# Altium PCB ClubNIKA.PcbDoc (part 1 of 3)
Units mm, origin at the board's own origin, x right, y up, seen from the top; angles counter-clockwise.
Board outline 246.38 x 165.73 mm, 2 copper layers (Top Layer, Bottom Layer); 346 components, 273 nets, 1174 pads, 422 vias.
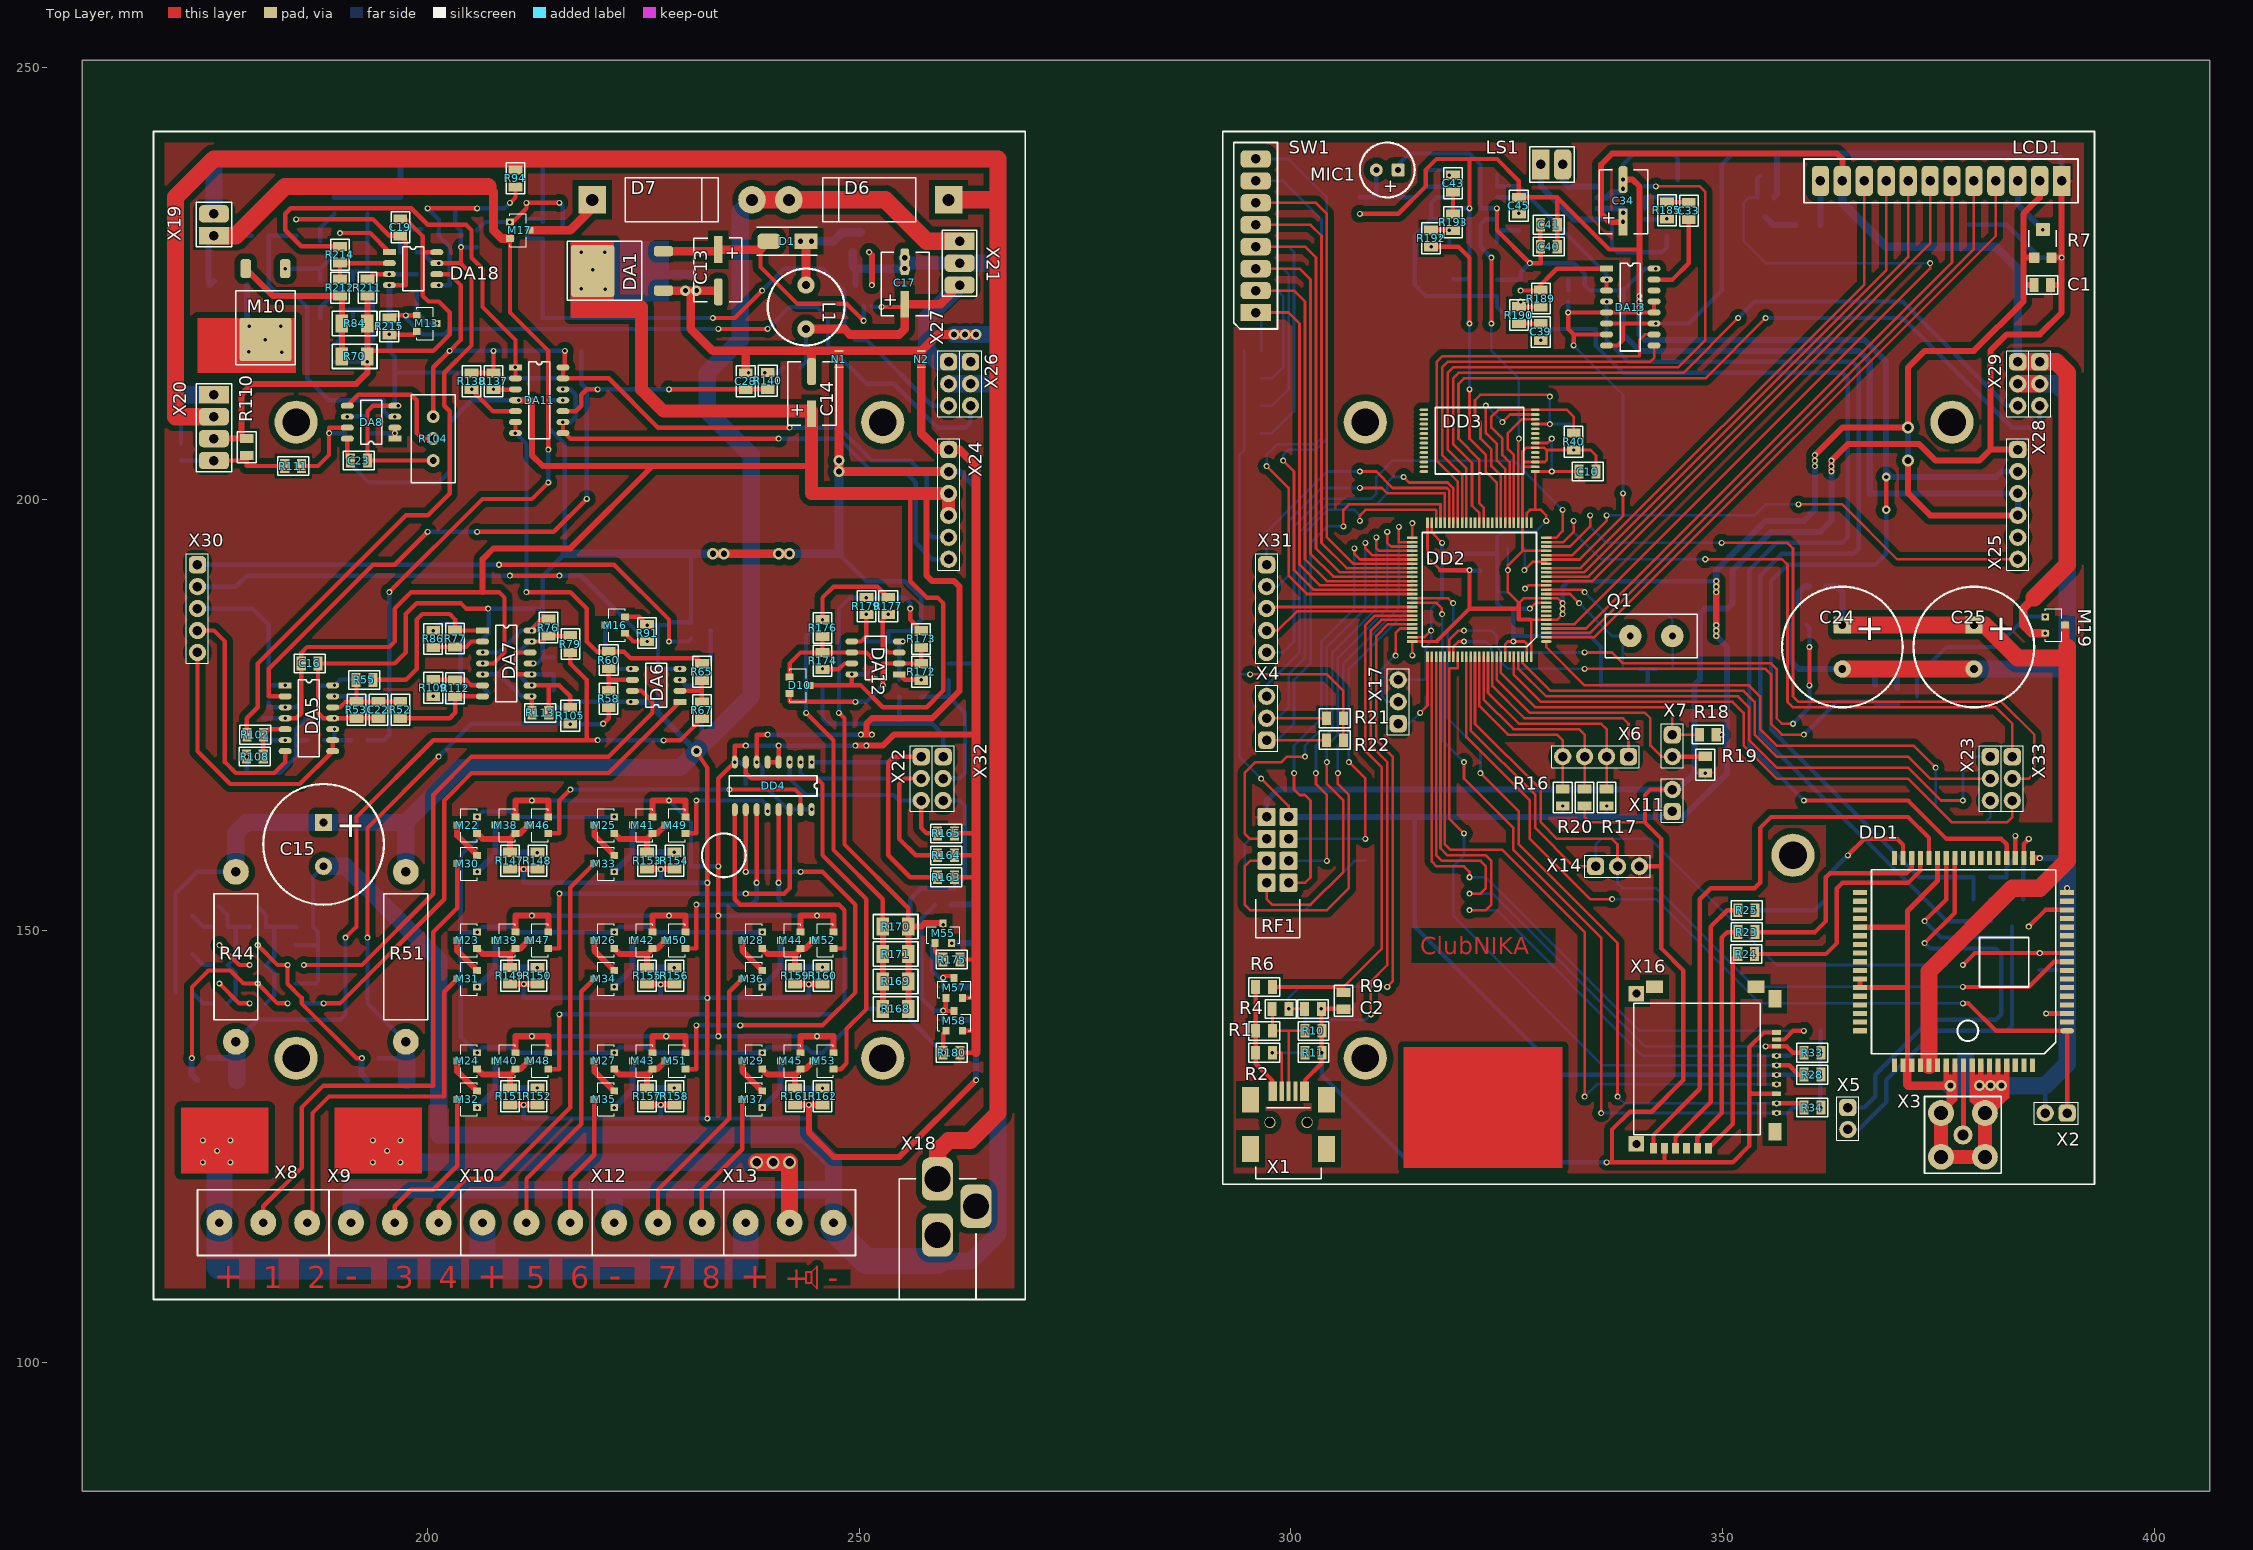
[diagram p0: Top Layer view]
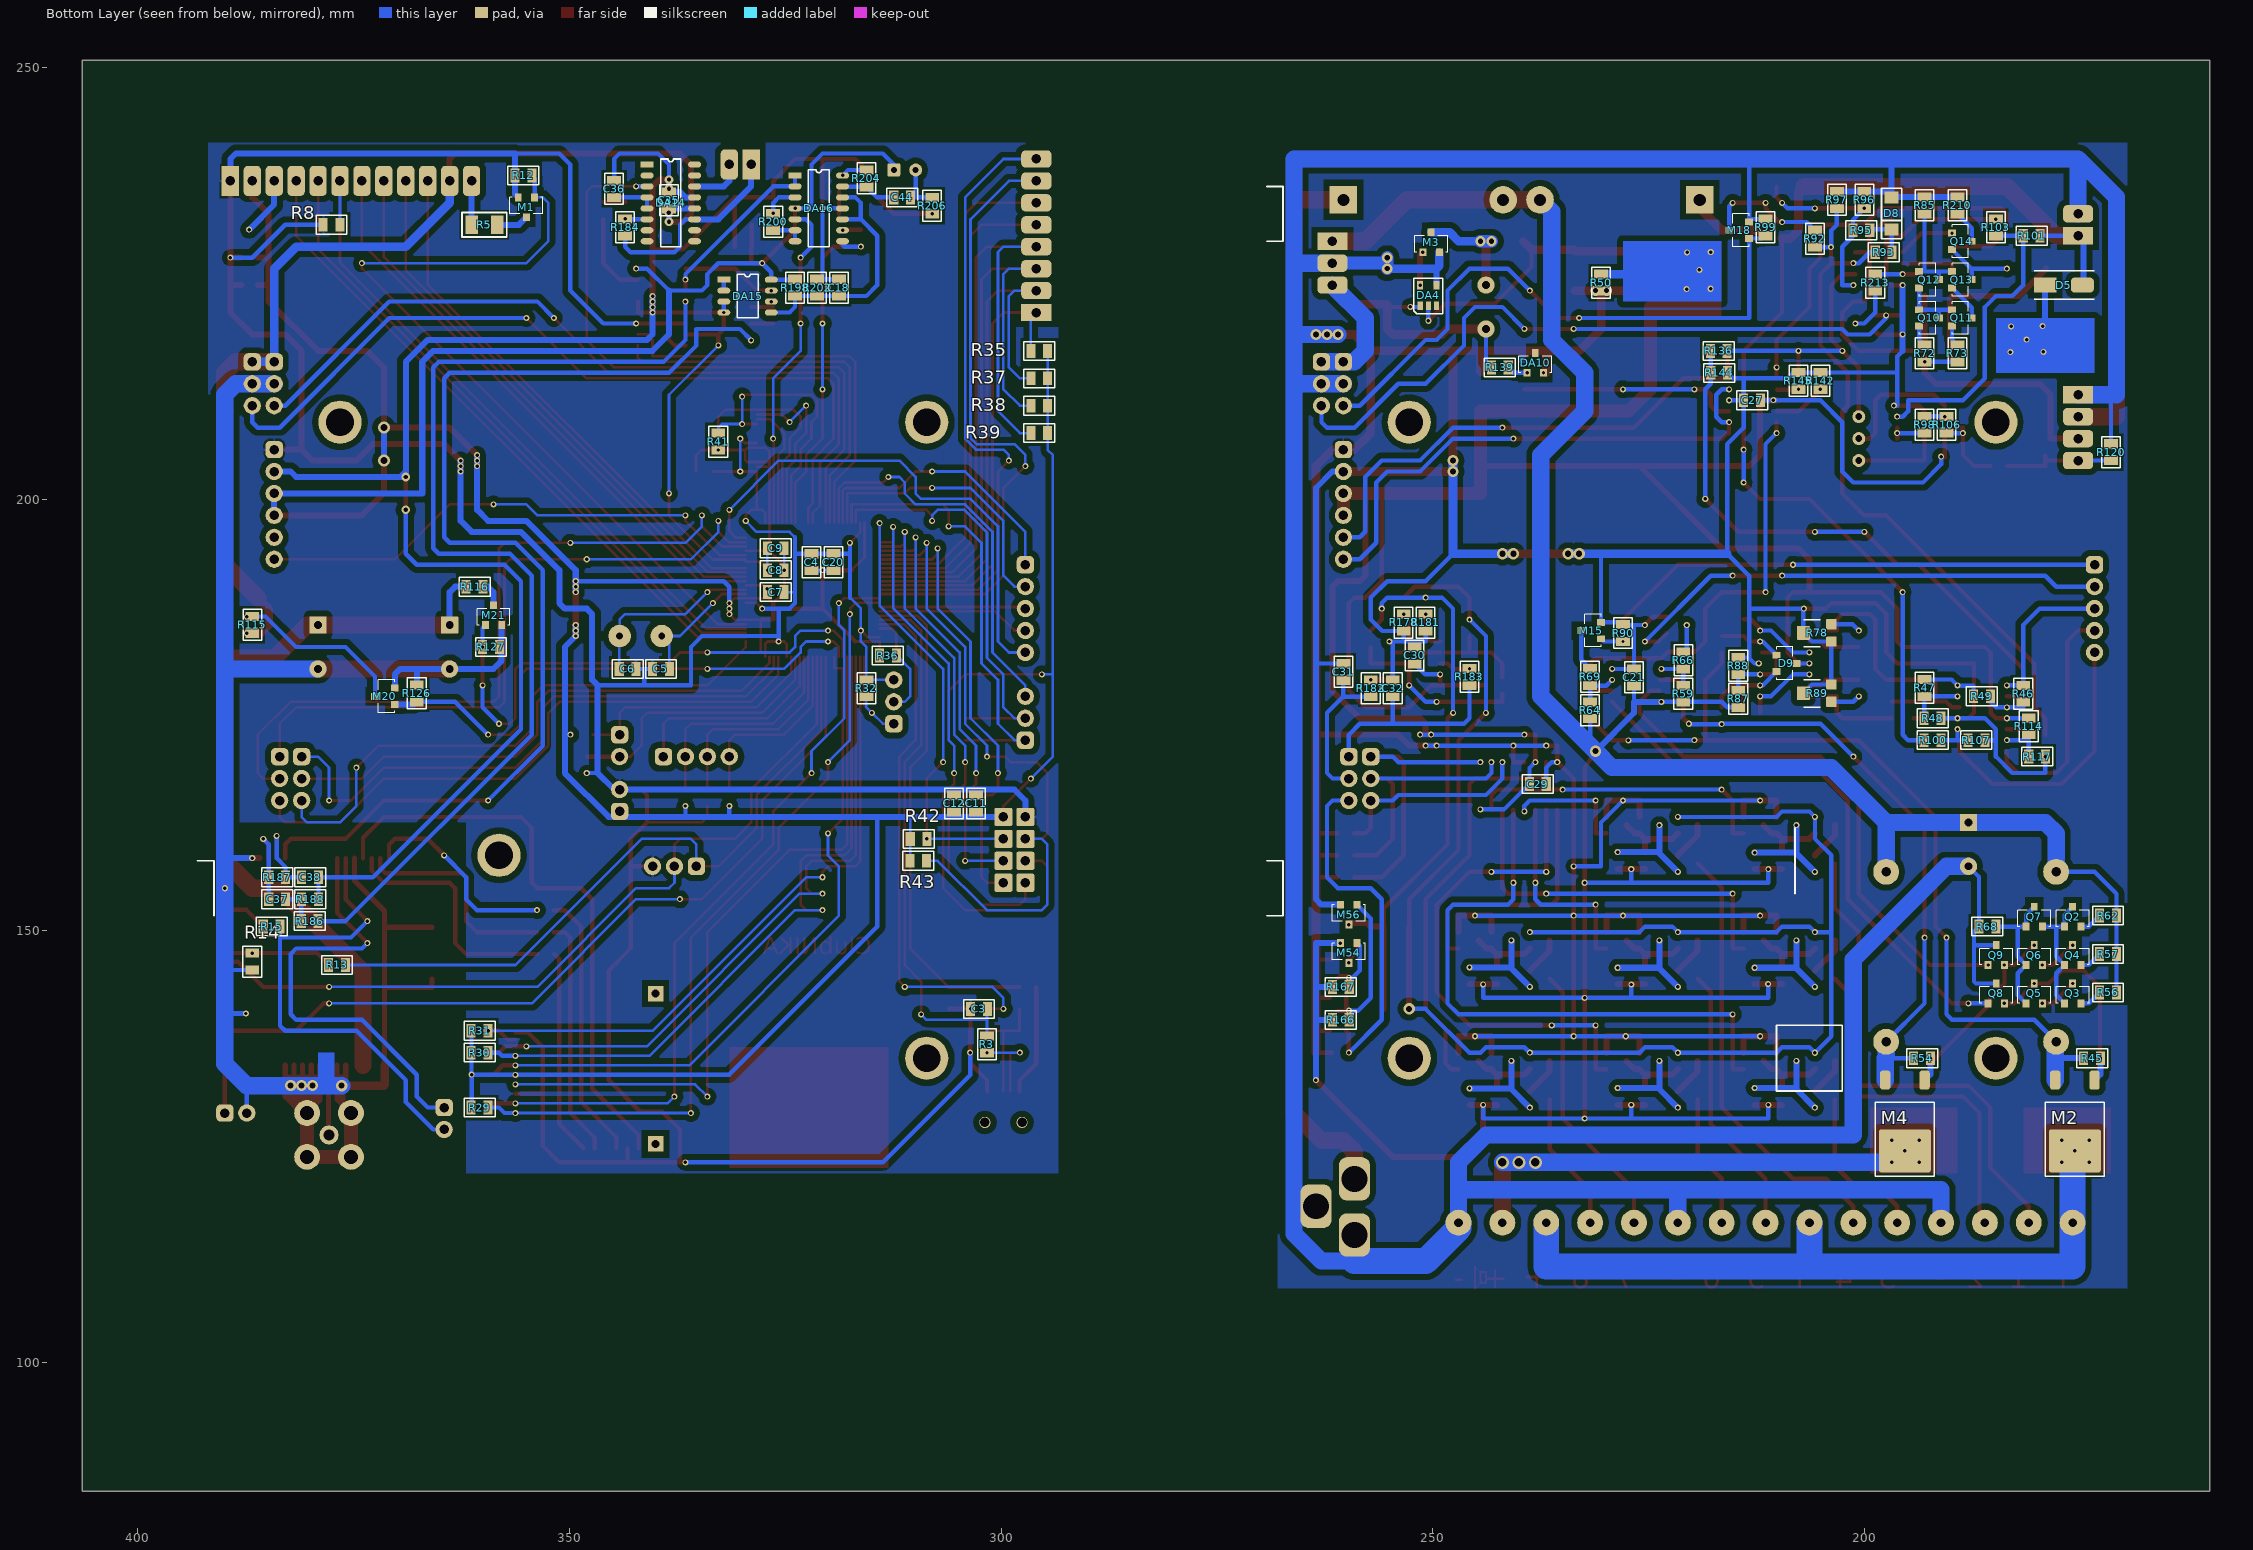
[diagram p1: Bottom Layer view, seen from below]

## Layer stack, top to bottom
Top Layer: signal copper 0.0356
Dielectric: dielectric 0.32, FR-4, Dk 4.8
Bottom Layer: signal copper 0.0356

## Board outline
160.02,250.825 160.02,85.09 406.4,85.09 406.4,250.825

## Design rules (kind name [scope] priority, off if disabled: settings)
Clearance Clearance_2 [All vs IsRegion] p1: gap=0.7
Clearance Clearance_1 [All vs IsVia] p2: gap=0.4
Clearance [All] p3: gap=0.2
ComponentClearance [All] p1: gap=0 collisioncheckmode=3 verticalgap=0 showdistances=FALSE
PlaneConnect [All] p1: planeconnectstyle=Relief reliefexpansion=0.6 reliefentries=4 reliefconductorwidth=0.3 reliefairgap=0.3
PolygonConnect [All] p1: connectstyle=Relief reliefconductorwidth=0.254 reliefentries=4 polygonreliefangle="90 Angle" airgapwidth=0.254
RoutingVias [All] p1: holewidth=0.7 width=1.3 viastyle="Through Hole" minholewidth=0.3 minwidth=0.6 maxholewidth=3 maxwidth=3.5
SilkscreenOverComponentPads [All] p1: minsilkscreentomaskgap=0.254
SolderMaskExpansion [All] p1: expansion=0.2
Width [All] p1: maxlimit=3 minlimit=0.2 preferedwidth=0.7
25 further rules are at their usual default settings.

## Classes and differential pairs
component class ClubNIKA: C1 C2 C3 C4 C5 C6 C7 C8 C9 C10 C11 C12 C20 C24 C25 DD1 DD2 DD3 LCD1 M1 M19 M20 M21 Q1 R1 R2 R3 R4 R5 R6 R7 R8 R9 R10 R11 R12 R13 R14 R15 R16 R17 R18 R19 R20 R21 R22 R23 R24 R25 R28 R29 R30 R31 R32 R33 R34 R35 R36 R37 R38 R39 R40 R41 R42 R43 R115 R116 R126 R127 RF1 SW1 X1 X2 X3 X4 X5 X6 X7 X8 X9 X10 X11 X12 X13 X14 X16 X17 X18 X19 X22 X23 X24 X25 X26 X27 X28 X29 X30 X31 X32 X33
component class Sound: C18 C33 C34 C35 C36 C37 C38 C39 C40 C41 C43 C44 C45 DA13 DA14 DA15 DA16 LS1 MIC1 R184 R185 R186 R187 R188 R189 R190 R192 R193 R198 R200 R202 R204 R206
component class Supply: C13 C14 C15 C16 C17 C19 C21 C22 C23 C27 C28 D1 D5 D6 D7 D8 D9 DA1 DA4 DA5 DA6 DA7 DA8 DA10 DA11 DA18 L1 M2 M3 M4 M10 M13 M15 M16 M17 M18 N1 N2 Q2 Q3 Q4 Q5 Q6 Q7 Q8 Q9 Q10 Q11 Q12 Q13 Q14 R44 R45 R46 R47 R48 R49 R50 R51 R52 R53 R54 R55 R56 R57 R58 R59 R60 R62 R64 R65 R66 R67 R68 R69 R70 R72 R73 R76 R77 R78 R79 R84 R85 R86 R87 R88 R89 R90 R91 R92 R93 R94 R95 R96 R97 R98 R99 R100 R101 R102 R103 R104 R105 R106 R107 R108 R109 R110 R111 R112 R113 R114 R117 R120 R136 R137 R138 R139 R140 R142 R144 R145 R210 R211 R212 R213 R214 R215 X20 X21
component class Zones: C29 C30 C31 C32 D10 DA12 DD4 M22 M23 M24 M25 M26 M27 M28 M29 M30 M31 M32 M33 M34 M35 M36 M37 M38 M39 M40 M41 M42 M43 M44 M45 M46 M47 M48 M49 M50 M51 M52 M53 M54 M55 M56 M57 M58 R147 R148 R149 R150 R151 R152 R153 R154 R155 R156 R157 R158 R159 R160 R161 R162 R163 R164 R165 R166 R167 R168 R169 R170 R171 R172 R173 R174 R175 R176 R177 R178 R179 R180 R181 R182 R183

## Components (designator, comment, footprint, x,y, rotation, side; value= is the part's Value field where it differs from the comment)
C1 "100n" 0805 387.985,224.79 r180 top
C2 "47p" 0805 303.53,140.97 r180 top
C3 "47p" 0805 303.53,140.97 r180 bottom
C4 "100n" 0805 321.945,193.675 r270 bottom
C5 "10pF" 0805 340.36,180.34 r180 bottom
C6 "10pF" 0805 342.265,180.34 r0 bottom
C7 "10n" 0805 325.12,189.23 r0 bottom
C8 "100n" 0805 325.12,191.77 r0 bottom
C9 "10n" 0805 325.12,194.31 r0 bottom
C10 "100n" 0805 333.375,203.2 r0 top
C11 "10n" 0805 302.895,165.735 r270 bottom
C12 "100n" 0805 305.435,165.735 r270 bottom
C13 "220u 6.3V" CALUM_SMD_C 233.68,228.6 r270 top
C14 "47u 6.3V" CALUM_SMD_C 244.475,210.185 r90 top
C15 "10uF 16V" CALUM_THT_E5D13 187.96,160.02 r270 top
C16 "100n" 0805 187.325,180.975 r180 top
C17 "10u 6.3V" CALUM_SMD_C 255.27,222.885 r90 top
C18 "100n" 0805 318.77,225.47 r270 bottom
C19 "100n" 0805 196.85,230.505 r90 top
C20 "1n" 0805 319.405,193.675 r270 bottom
C21 "100n" 0805 226.695,180.34 r270 bottom
C22 "1n" 0805 194.31,174.625 r90 top
C23 "100n" 0805 193.04,204.47 r180 top
C24 "220uF 6.3V" CALUM_THT_E5D13 363.855,182.88 r270 top
C25 "220uF 6.3V" CALUM_THT_E5D13 379.095,182.88 r270 top
C27 "100n" 0805 213.995,211.455 r180 bottom
C28 "2.2u" 0805 236.855,214.63 r270 top
C29 "100n" 0805 236.855,167.005 r0 bottom
C30 "100n" 0805 252.095,182.88 r270 bottom
C31 "10n" 0805 260.35,180.975 r270 bottom
C32 "10n" 0805 254.635,179.07 r270 bottom
C33 "100n" 0805 346.075,232.41 r90 top
C34 "100u 6.3V" CALUM_SMD_C 338.455,232.41 r90 top
C35 "100n" 0805 338.455,235.585 r270 bottom
C36 "2.2u" 0805 344.805,234.95 r90 bottom
C37 "2.2u" 0805 384.81,153.67 r180 bottom
C38 "2.2u" 0805 381,156.21 r180 bottom
C39 "100n" 0805 328.93,220.345 r270 top
C40 "100n" 0805 330.835,229.235 r180 top
C41 "10n" 0805 330.835,231.775 r180 top
C43 "220n" 0805 318.77,235.585 r90 top
C44 "220n" 0805 312.42,234.95 r180 bottom
C45 "10n" 0805 326.39,234.95 r270 top
D1 "S1M" DO-214AC 243.836,229.87 r180 top
D5 "S1M" DO-214AC 179.07,224.79 r180 bottom
D6 "1N5821" DO-201AD 260.35,234.664 r180 top
D7 "1N5821" DO-201AD 219.075,234.664 r0 top
D8 "BZV55C3V0" SOD80 196.85,234.95 r270 bottom
D9 "BAT54C" SOT-23 210.185,180.975 r270 bottom
D10 "BAT54C" SOT-23 241.935,178.435 r270 top
DA1 "MC33269DTRK-3.3" LINREG_DPAK 227.33,224.155 r90 top
DA4 "NCP1450-5V" TSSOP5 249.555,224.79 r0 bottom
DA5 "MCP604" SOP14 183.515,178.435 r0 top
DA6 "LM358" SOP8 229.235,176.53 r180 top
DA7 "MCP604" SOP14 206.375,184.785 r0 top
DA8 "MCP602" SOP8 196.215,207.01 r180 top
DA10 "LM4040C30" SOT-23 238.125,214.63 r180 bottom
DA11 "MCP604" SOP14 210.185,215.265 r0 top
DA12 "MCP602" SOP8 254.635,179.705 r180 top
DA13 "74HC4053" SOP16 336.55,226.695 r0 top
DA14 "TDA8543" SOP16 340.995,238.76 r180 bottom
DA15 "MCP602" SOP8 332.105,225.425 r180 bottom
DA16 "MCP604" SOP14 323.85,237.49 r180 bottom
DA18 "LM358" SOP8 195.58,228.6 r0 top
DD1 "SIM900R" SIM900_R 389.89,138.43 r180 top
DD2 "STM32F103VET6" QFP100 329.565,183.515 r180 top
DD3 "AT45DB161" TSOP28 328.295,203.2 r180 top
DD4 "74HC138" SOP16 244.475,169.545 r270 top
L1 "10uH 1A" INDUCTOR_5mm 243.84,222.25 r270 top
LCD1 "HD44780" LCD_HD44780_5 389.255,236.855 r180 top
LS1 "8 Ohm" PLS_2#1 331.47,238.76 r0 top
M1 "2N7002" SOT-23 354.965,234.95 r0 bottom
M2 "IRFR5505" TO-252(DPAK) 173.355,132.715 r0 bottom
M3 "PMV40UN" SOT-23 250.19,228.6 r180 bottom
M4 "IRFR5505" TO-252(DPAK) 193.04,132.715 r0 bottom
M10 "IRFR9024" TO-252(DPAK) 183.515,226.695 r180 top
M13 "2N7002" SOT-23 198.755,220.345 r270 top
M15 "2N7002" SOT-23 230.505,184.785 r90 bottom
M16 "2N7002" SOT-23 222.885,185.42 r90 top
M17 "IRLML5203" SOT-23 209.55,231.14 r270 top
M18 "2N7002" SOT-23 213.36,231.14 r90 bottom
M19 "IRLML2244" SOT-23 387.35,185.42 r270 top
M20 "2N7002" SOT-23 370.205,177.165 r90 bottom
M21 "2N7002" SOT-23 358.775,185.42 r180 bottom
M22 "2N7002" SOT-23 205.74,162.24 r90 top
M23 "2N7002" SOT-23 205.74,148.905 r90 top
M24 "2N7002" SOT-23 205.74,134.935 r90 top
M25 "2N7002" SOT-23 221.615,162.24 r90 top
M26 "2N7002" SOT-23 221.615,148.905 r90 top
M27 "2N7002" SOT-23 221.615,134.935 r90 top
M28 "2N7002" SOT-23 238.76,148.905 r90 top
M29 "2N7002" SOT-23 238.76,134.935 r90 top
M30 "BSS84" SOT-23 205.74,157.795 r90 top
M31 "BSS84" SOT-23 205.74,144.46 r90 top
M32 "BSS84" SOT-23 205.74,130.49 r90 top
M33 "BSS84" SOT-23 221.615,157.795 r90 top
M34 "BSS84" SOT-23 221.615,144.46 r90 top
M35 "BSS84" SOT-23 221.615,130.49 r90 top
M36 "BSS84" SOT-23 238.76,144.46 r90 top
M37 "BSS84" SOT-23 238.76,130.49 r90 top
M38 "2N7002" SOT-23 210.185,162.24 r90 top
M39 "2N7002" SOT-23 210.185,148.905 r90 top
M40 "2N7002" SOT-23 210.185,134.935 r90 top
M41 "2N7002" SOT-23 226.06,162.24 r90 top
M42 "2N7002" SOT-23 226.06,148.905 r90 top
M43 "2N7002" SOT-23 226.06,134.935 r90 top
M44 "2N7002" SOT-23 243.205,148.905 r90 top
M45 "2N7002" SOT-23 243.205,134.935 r90 top
M46 "2N7002" SOT-23 213.995,162.24 r90 top
M47 "2N7002" SOT-23 213.995,148.905 r90 top
M48 "2N7002" SOT-23 213.995,134.935 r90 top
M49 "2N7002" SOT-23 229.87,162.24 r90 top
M50 "2N7002" SOT-23 229.87,148.905 r90 top
M51 "2N7002" SOT-23 229.87,134.935 r90 top
M52 "2N7002" SOT-23 247.015,148.905 r90 top
M53 "2N7002" SOT-23 247.015,134.935 r90 top
M54 "BSS84" SOT-23 259.715,148.59 r0 bottom
M55 "BSS84" SOT-23 259.715,148.59 r0 top
M56 "2N7002" SOT-23 259.715,153.035 r0 bottom
M57 "2N7002" SOT-23 260.985,142.24 r0 top
M58 "2N7002" SOT-23 260.985,138.43 r0 top
MIC1 "MIC" MIC_6.0x5.2 311.15,238.125 r180 top
N1 "NetTie" NET_TIE_1mm 247.65,215.9 r270 top net-tie
N2 "NetTie" NET_TIE_1mm 257.175,215.9 r270 top net-tie
Q1 "KX-K 8.0 MHz" OSC1_THT_10,8x4,5 344.17,184.15 r180 top
Q2 "BC857C" SOT-23 175.895,150.495 r180 bottom
Q3 "BC857C" SOT-23 175.895,141.605 r180 bottom
Q4 "BC857C" SOT-23 175.895,146.05 r180 bottom
Q5 "BC857C" SOT-23 180.34,141.605 r180 bottom
Q6 "BC857C" SOT-23 180.34,146.05 r180 bottom
Q7 "BC857C" SOT-23 180.34,150.495 r180 bottom
Q8 "BC857C" SOT-23 184.74,141.605 r180 bottom
Q9 "BC857C" SOT-23 184.74,146.05 r180 bottom
Q10 "BC857C" SOT-23 193.675,220.98 r270 bottom
Q11 "BC857C" SOT-23 189.865,220.98 r270 bottom
Q12 "BC857C" SOT-23 193.675,225.425 r270 bottom
Q13 "BC857C" SOT-23 189.865,225.425 r270 bottom
Q14 "BC857C" SOT-23 189.865,229.87 r270 bottom
R1 "1.5K" 0805 295.91,138.43 r0 top
R2 "1.5K" 0805 295.91,135.89 r0 top
R3 "22" 0805 301.625,135.89 r90 bottom
R4 "22" 0805 297.815,140.97 r0 top
R5 "R" 1206 361.315,231.775 r180 bottom
R6 "12K" 0805 295.91,143.51 r0 top
R7 "24K" "3305SMD(adj res)" 386.08,227.965 r0 top
R8 "51K" 0805 376.555,231.775 r0 bottom
R9 "20K" 0805 306.07,142.875 r270 top
R10 "100K" 0805 301.625,138.43 r0 top
R11 "100K" 0805 301.625,135.89 r0 top
R12 "51K" 0805 354.33,237.49 r0 bottom
R13 "270" 0805 375.92,146.05 r0 bottom
R14 "1.2K" 0805 386.715,147.43 r270 bottom
R15 "51K" 0805 385.445,150.495 r180 bottom
R16 "51K" 0805 331.47,164.465 r90 top
R17 "51K" 0805 336.55,164.465 r90 top
R18 "20K" 0805 349.25,172.72 r180 top
R19 "20K" 0805 347.98,168.275 r90 top
R20 "51K" 0805 334.01,164.465 r90 top
R21 "51K" 0805 306.07,174.625 r180 top
R22 "51K" 0805 306.07,172.085 r180 top
R23 "22" 0805 351.79,149.86 r0 top
R24 "22" 0805 353.695,147.32 r180 top
R25 "22" 0805 351.79,152.4 r0 top
R28 "51K" 0805 359.41,133.35 r0 top
R29 "51K" 0805 359.41,129.54 r0 bottom
R30 "51K" 0805 359.41,135.89 r0 bottom
R31 "51K" 0805 359.41,138.43 r0 bottom
R32 "100K" 0805 315.595,179.07 r270 bottom
R33 "51K" 0805 359.41,135.89 r0 top
R34 "51K" 0805 359.41,129.54 r0 top
R35 "51K" 0805 296.545,217.17 r180 bottom
R36 "51K" 0805 312.129,181.885 r0 bottom
R37 "51K" 0805 296.545,213.995 r180 bottom
R38 "51K" 0805 296.545,210.82 r180 bottom
R39 "51K" 0805 296.545,207.645 r180 bottom
R40 "51K" 0805 332.74,207.645 r270 top
R41 "51K" 0805 332.74,207.645 r270 bottom
R42 "51K" 0805 310.515,160.655 r180 bottom
R43 "51K" 0805 308.61,158.115 r0 bottom
R44 "0.51 Ohm 2W" RES_2W 177.8,137.16 r90 top
R45 "51K" 0805 174.625,135.255 r180 bottom
R46 "100K" 0805 181.61,178.435 r270 bottom
R47 "20K" 0805 193.04,177.165 r90 bottom
R48 "10K" 0805 191.135,174.625 r0 bottom
R49 "390" 0805 185.42,177.165 r0 bottom
R50 "1K" 0805 230.505,226.06 r270 bottom
R51 "0.51 Ohm 2W" RES_2W 197.485,137.16 r90 top
R52 "51K" 0805 196.85,174.625 r90 top
R53 "51K" 0805 191.77,174.625 r90 top
R54 "51K" 0805 194.31,135.255 r180 bottom
R55 "51K" 0805 193.675,179.07 r180 top
R56 "100" 0805 170.815,142.875 r0 bottom
R57 "100" 0805 170.815,147.32 r0 bottom
R58 "20K" 0805 220.98,177.845 r270 top
R59 "20K" 0805 220.98,178.435 r270 bottom
R60 "20K" 0805 220.98,180.385 r90 top
R62 "100" 0805 170.815,151.765 r0 bottom
R64 "20K" 0805 231.775,176.53 r270 bottom
R65 "20K" 0805 231.775,180.975 r270 top
R66 "20K" 0805 220.98,180.34 r90 bottom
R67 "20K" 0805 231.775,176.53 r270 top
R68 "5.1K" 0805 184.785,150.495 r0 bottom
R69 "20K" 0805 231.775,178.435 r90 bottom
R70 "2" 1206 193.04,216.535 r180 top
R72 "100" 0805 193.04,215.9 r90 bottom
R73 "100" 0805 189.23,215.9 r90 bottom
R76 "10K" 0805 213.995,184.15 r90 top
R77 "39K" 0805 203.2,182.88 r90 top
R78 "5.1K" "3305SMD(adj res)" 203.835,183.515 r90 bottom
R79 "39K" 0805 216.535,182.245 r90 top
R84 "2" 1206 193.04,220.345 r180 top
R85 "3.6K" 0805 193.04,233.045 r90 bottom
R86 "8.2K" 0805 200.66,184.785 r270 top
R87 "39K" 0805 214.63,175.895 r90 bottom
R88 "10K" 0805 214.63,179.705 r90 bottom
R89 "5.1K" "3305SMD(adj res)" 203.835,176.53 r90 bottom
R90 "51K" 0805 227.965,183.515 r90 bottom
R91 "51K" 0805 225.425,183.515 r90 top
R92 "20K" 0805 205.74,231.14 r270 bottom
R93 "3K" 0805 198.755,228.6 r180 bottom
R94 "39K" 0805 210.185,238.125 r270 top
R95 "100K" 0805 199.39,231.14 r0 bottom
R96 "20K" 0805 200.025,233.68 r90 bottom
R97 "20K" 0805 203.2,233.68 r90 bottom
R98 "20K" 0805 193.04,207.645 r90 bottom
R99 "51K" 0805 211.455,230.505 r90 bottom
R100 "51K" 0805 191.135,172.085 r0 bottom
R101 "56K" 0805 181.61,230.505 r180 bottom
R102 "51K" 0805 179.07,172.72 r0 top
R103 "4.7K" 0805 184.785,230.505 r90 bottom
R104 "10K" "3296 X W(ADJ RES)" 200.66,209.55 r270 top
R105 "39K" 0805 216.535,175.895 r270 top
R106 "20K" 0805 190.5,207.645 r90 bottom
R107 "10K" 0805 186.055,172.085 r0 bottom
R108 "10K" 0805 180.975,170.18 r180 top
R109 "8.2K" 0805 200.66,177.165 r90 top
R110 "62K" 0805 179.07,207.01 r270 top
R111 "4.7K" 0805 185.42,203.835 r180 top
R112 "39K" 0805 203.2,179.07 r270 top
R113 "10K" 0805 212.09,175.26 r0 top
R114 "120K" 0805 180.975,172.72 r90 bottom
R115 "20K" 0805 386.715,184.47 r90 bottom
R116 "51" 0805 361.95,189.865 r180 bottom
R117 "10K" 0805 180.975,170.18 r180 bottom
R120 "51K" 0805 171.45,204.47 r90 bottom
R126 "51K" 0805 367.665,176.53 r90 bottom
R127 "51K" 0805 360.045,182.88 r180 bottom
R136 "100K" 0805 215.9,217.17 r0 bottom
R137 "100K" 0805 207.645,214.63 r270 top
R138 "51K" 0805 205.105,214.63 r270 top
R139 "510" 0805 243.205,215.265 r180 bottom
R140 "1K" 0805 239.395,212.725 r90 top
R142 "51K" 0805 205.105,212.725 r90 bottom
R144 "20K" 0805 217.805,214.63 r180 bottom
R145 "11K" 0805 207.645,212.725 r90 bottom
R147 "100K" 0805 209.55,157.16 r90 top
R148 "100K" 0805 212.725,157.16 r90 top
R149 "100K" 0805 209.55,143.825 r90 top
R150 "100K" 0805 212.725,143.825 r90 top
R151 "100K" 0805 209.55,129.855 r90 top
R152 "100K" 0805 212.725,129.855 r90 top
R153 "100K" 0805 225.425,157.16 r90 top
R154 "100K" 0805 228.6,157.16 r90 top
R155 "100K" 0805 225.425,143.825 r90 top
R156 "100K" 0805 228.6,143.825 r90 top
R157 "100K" 0805 225.425,129.855 r90 top
R158 "100K" 0805 228.6,129.855 r90 top
R159 "100K" 0805 242.57,143.825 r90 top
R160 "100K" 0805 245.745,143.825 r90 top
R161 "100K" 0805 242.57,129.855 r90 top
R162 "100K" 0805 245.745,129.855 r90 top
R163 "51K" 0805 259.08,156.21 r0 top
R164 "51K" 0805 259.08,158.75 r0 top
R165 "51K" 0805 259.08,161.29 r0 top
R166 "51K" 0805 261.62,139.7 r180 bottom
R167 "51K" 0805 261.62,143.51 r180 bottom
R168 "1.6K" 1206 252.73,140.97 r0 top
R169 "1.6K" 1206 252.73,144.145 r0 top
R170 "1.6K" 1206 252.73,150.495 r0 top
R171 "1.6K" 1206 252.73,147.32 r0 top
R172 "20K" 0805 257.175,180.975 r270 top
R173 "82K" 0805 257.175,184.785 r270 top
R174 "20K" 0805 245.745,182.245 r270 top
R175 "51K" 0805 259.715,146.685 r0 top
R176 "82K" 0805 245.745,186.055 r270 top
R177 "82K" 0805 253.365,188.595 r270 top
R178 "20K" 0805 253.365,186.69 r270 bottom
R179 "82K" 0805 250.825,188.595 r270 top
R180 "51K" 0805 259.715,135.89 r0 top
R181 "20K" 0805 250.825,186.69 r270 bottom
R182 "1K" 0805 257.175,179.07 r270 bottom
R183 "1K" 0805 245.745,178.435 r90 bottom
R184 "3.3k" 0805 343.535,230.505 r90 bottom
R185 "10k" 0805 343.535,232.455 r90 top
R186 "100K" 0805 379.095,151.13 r0 bottom
R187 "7.5K" 0805 384.81,156.21 r180 bottom
R188 "100" 0805 381,153.67 r180 bottom
R189 "62K" 0805 328.93,222.25 r90 top
R190 "10K" 0805 326.39,220.345 r90 top
R192 "51K" 0805 316.23,229.235 r90 top
R193 "4.7K" 0805 318.77,233.045 r270 top
R198 "20K" 0805 323.85,225.47 r270 bottom
R200 "2K" 0805 326.39,231.14 r90 bottom
R202 "20K" 0805 321.31,223.52 r90 bottom
R204 "51K" 0805 315.595,238.125 r270 bottom
R206 "4.7K" 0805 307.975,234.95 r270 bottom
R210 "1K" 0805 189.23,233.045 r90 bottom
R211 "20K" 0805 193.04,223.52 r90 top
R212 "20K" 0805 189.865,223.52 r90 top
R213 "20K" 0805 198.755,226.06 r270 bottom
R214 "20K" 0805 189.865,227.33 r90 top
R215 "51K" 0805 195.58,220.98 r270 top
RF1 "NRF24L01" NRF24L01_MOD_ANGLE 297.18,163.195 r270 top
SW1 "KEYBOARD4x4" KEYBOURD_4x4_1 295.91,239.395 r270 top
X1 "mini-USBB" MINI_USBA_FEMALE 299.72,131.445 r0 top
X2 "PLS" PLS_2#2 389.89,128.905 r180 top
X3 "SMA_FEMALE" SMA_FEMALE 375.285,128.905 r0 top
X4 "PLS3" PLS_3 297.18,172.085 r90 top
X5 "PLS" PLS_2#2 364.49,129.54 r270 top
X6 "PLS4" PLS_4 339.09,170.18 r180 top
X7 "PLS" PLS_2#2 344.17,172.72 r270 top
X8 "PLS3" "TERMINALS_7.7x15.5(step 5mm)" 175.895,116.205 r0 top
X9 "PLS3" "TERMINALS_7.7x15.5(step 5mm)" 191.135,116.205 r0 top
X10 "PLS3" "TERMINALS_7.7x15.5(step 5mm)" 206.375,116.205 r0 top
X11 "PLS" PLS_2#2 344.17,163.83 r90 top
X12 "PLS3" "TERMINALS_7.7x15.5(step 5mm)" 221.615,116.205 r0 top
X13 "PLS3" "TERMINALS_7.7x15.5(step 5mm)" 236.855,116.205 r0 top
X14 "PLS3" PLS_3 335.28,157.48 r0 top
X16 "SIM_SD_HOLDER1" SIM_SD_HOLDER1 356.235,138.43 r270 top
X17 "PLS3" PLS_3 312.42,173.99 r90 top
X18 "SUPPLY_1" SUP_SOCK_D5.5D1.8 259.08,121.285 r270 top
X19 "PLS" PLS_2#1 175.26,233.045 r90 top
X20 "PLS4" PLS_4_BIG 175.26,208.28 r270 top
X21 "PLS3" PLS_3_BIG 261.62,227.33 r270 top
X22 "PLS3" PLS_3 257.175,170.18 r270 top
X23 "PLS3" PLS_3 381,170.18 r270 top locked
X24 "PLS6" PLS_6 260.35,205.74 r270 top
X25 "PLS6" PLS_6 384.175,205.74 r270 top locked
X26 "PLS3" PLS_3 262.89,215.9 r270 top
X27 "PLS3" PLS_3 260.35,215.9 r270 top
X28 "PLS3" PLS_3 386.715,215.9 r270 top locked
X29 "PLS3" PLS_3 384.175,215.9 r270 top locked
X30 "CONT_5" PLS_5 173.355,192.405 r270 top
X31 "CONT_5" PLS_5 297.18,192.405 r270 top locked
X32 "PLS3" PLS_3 259.715,170.18 r270 top
X33 "PLS3" PLS_3 383.54,170.18 r270 top locked

## Footprints (in the part's own frame and the unit in brackets; to place one, negate y for a bottom-side part, rotate by r counter-clockwise, add the part's x,y. Pads: shape width x height; smd on the part's side, far side on the other; paste and mask are expansions set on the pad)
0805 [mm]
  rect 1.05x1.6 smd: 1(0,0) 2(1.95,0)
  silkscreen extent -0.81,-1.08 2.77,1.07
1206 [mm]
  rect 1.45x2.1 smd: 1(0,0) 2(2.95,0)
  silkscreen extent -1.11,-1.41 4.08,1.42
"3296 X W(ADJ RES)" [mm]
  round 1.5 hole 0.8: 1(0,0) 2(5.08,0) 3(2.54,0)
  silkscreen extent -2.54,-2.54 7.65,2.54
"3305SMD(adj res)" [mm]
  rrect10% 1.2x1.2 smd: 1(0,0) 2(2,0)
  rrect10% 1.6x1.5 smd: 3(1,3.25)
  silkscreen extent -0.64,1.27 2.54,3.17
CALUM_SMD_C [mm]
  rect 3.1x1 smd: 1(-0.3,0)
  rrect50% 3.1x1 smd: 2(4.6,0)
  silkscreen extent -1.65,-2.86 5.72,2.73
CALUM_THT_E5D13 [mm] "Space between pins is 5mm"
  rrect10% 2x2 hole 0.9: 1(-2.54,0)
  round 2 hole 0.9: 2(2.54,0)
  silkscreen extent -6.98,-6.98 6.98,6.98
DO-201AD [mm]
  rect 3.2x3.2 hole 1.4: 1(0,0)
  round 3.2 hole 1.4: 2(18.5,0)
  silkscreen extent 3.81,-2.54 14.6,2.54
DO-214AC [mm]
  rect 2.65x1.75 smd: 1(0,0)
  rrect50% 2.65x1.75 smd: 2(4.3,0)
  silkscreen extent -1.29,-1.62 5.7,1.64
INDUCTOR_5mm [mm] "Pin space is 5mm"
  round 2 hole 0.9: 1(-2.54,0) 2(2.54,0)
  silkscreen extent -4.44,-4.44 4.44,4.44
KEYBOURD_4x4_1 [mm] "Membrane (from ebay)"
  rrect50% 2x3.5 hole 1.1: C1(10.16,0) C2(12.7,0) C3(15.24,0) R1(0,0) R2(2.54,0) R3(5.08,0) R4(7.62,0)
  rect 2x3.5 hole 1.1: C4(17.78,0)
  silkscreen extent -1.91,-2.54 19.68,2.54
LCD_HD44780_5 [mm]
  rrect50% 2x3.5 hole 1.1: DB4(15.24,0) DB5(17.78,0) DB6(20.32,0) DB7(22.86,0) E(12.7,0) LED+(25.4,0) LED-(27.94,0) RS(7.62,0) RW(10.16,0) V0(5.08,0) VDD(2.54,0)
  rect 2x3.5 hole 1.1: GND(0,0)
  silkscreen extent -1.91,-2.54 29.84,2.54
LINREG_DPAK [mm]
  rrect50% 1.2x2.2 smd: gnd(0,0) in(4.56,0)
  rrect10% 6x5 smd: out(2.28,8.2)
  silkscreen extent -1.14,2.54 5.71,11.12
MIC_6.0x5.2 [mm]
  rrect20% 1.5x1.5 hole 0.7: +(-1.27,0)
  round 1.5 hole 0.7: -(1.27,0)
  silkscreen extent -3.17,-3.17 3.17,3.17
MINI_USBA_FEMALE [mm]
  rect 2x3 smd: 0(-4.4,-6.7) 0(-4.4,-1) 0(4.4,-6.7) 0(4.4,-1)
  round 1.3 hole 1.1: 0(-2.15,-3.63) 0(2.15,-3.63)
  rect 1x2.25 smd: +5(-1.85,0) GND(1.85,0)
  rect 0.5x2.25 smd: D+(0,0) D-(-0.8,0) ID(0.8,0)
  silkscreen extent -3.81,-10.16 3.81,-1.91
NET_TIE_1mm [mm]
  rect 0.2x1 smd paste+0 mask+0: 1(-1.27,0) 2(0.635,0)
  Top Layer region: -1.27,-0.499 0.631,-0.499 0.631,0.5 -1.27,0.5
NRF24L01_MOD_ANGLE [mm]
  rrect20% 2.1x2.1 hole 1.1: 1(0,0) 2(0,2.54) 3(2.54,0) 4(2.54,2.54) 5(5.08,0) 6(5.08,2.54) 7(7.62,0) 8(7.62,2.54)
  silkscreen extent 9.53,-1.27 13.97,3.81
OSC1_THT_10,8x4,5 [mm]
  round 2.6 hole 0.8: 1(4.88,0) 2(0,0)
  silkscreen extent -2.87,-2.54 7.77,2.54
PLS_2#1 [mm]
  rect 2x3.5 hole 1.1: 1(-2.54,0)
  rrect50% 2x3.5 hole 1.1: 2(0,0)
  silkscreen extent -3.83,-2.04 1.31,2.05
PLS_2#2 [mm]
  rrect50% 2x2 hole 1.1: 1(0,0)
  round 2 hole 1.1: 2(2.54,0)
  silkscreen extent -1.27,-1.27 3.81,1.27
PLS_3 [mm]
  rrect50% 2x2 hole 1.1: 1(0,0)
  round 2 hole 1.1: 2(2.54,0) 3(5.08,0)
  silkscreen extent -1.27,-1.27 6.35,1.27
PLS_3_BIG [mm]
  rect 2x3.5 hole 1.1: 1(-2.54,0)
  rrect50% 2x3.5 hole 1.1: 2(0,0) 3(2.54,0)
  silkscreen extent -3.8,-2.01 3.81,2.01
PLS_4 [mm]
  rrect50% 2x2 hole 1.1: 1(0,0)
  round 2 hole 1.1: 2(2.54,0) 3(5.08,0) 4(7.62,0)
  silkscreen extent -1.27,-1.27 8.89,1.27
PLS_4_BIG [mm]
  rect 2x3.5 hole 1.1: 1(-3.81,0)
  rrect50% 2x3.5 hole 1.1: 2(-1.27,0) 3(1.27,0) 4(3.81,0)
  silkscreen extent -5.11,-2.05 5.12,2.06
PLS_5 [mm]
  rrect50% 2x2 hole 1.1: 1(0,0)
  round 2 hole 1.1: 2(2.54,0) 3(5.08,0) 4(7.62,0) 5(10.16,0)
  silkscreen extent -1.27,-1.27 11.43,1.27
PLS_6 [mm]
  rrect50% 2x2 hole 1.1: 1(0,0)
  round 2 hole 1.1: 2(2.54,0) 3(5.08,0) 4(7.62,0) 5(10.16,0) 6(12.7,0)
  silkscreen extent -1.27,-1.27 13.97,1.27
QFP100 [mm]
  oval 1.2x0.3 smd: 1(0,0)
  rect 1.2x0.3 smd: 2(0,-0.5) 3(0,-1) 4(0,-1.5) 5(0,-2) 6(0,-2.5) 7(0,-3) 8(0,-3.5) 9(0,-4) 10(0,-4.5) 11(0,-5) 12(0,-5.5) 13(0,-6) 14(0,-6.5) 15(0,-7) 16(0,-7.5) 17(0,-8) 18(0,-8.5) 19(0,-9) 20(0,-9.5) 21(0,-10) 22(0,-10.5) 23(0,-11) 24(0,-11.5) 25(0,-12) 51(15.5,-12) 52(15.5,-11.5) 53(15.5,-11) 54(15.5,-10.5) 55(15.5,-10) 56(15.5,-9.5) 57(15.5,-9) 58(15.5,-8.5) 59(15.5,-8) 60(15.5,-7.5) 61(15.5,-7) 62(15.5,-6.5) 63(15.5,-6) 64(15.5,-5.5) 65(15.5,-5) 66(15.5,-4.5) 67(15.5,-4) 68(15.5,-3.5) 69(15.5,-3) 70(15.5,-2.5) 71(15.5,-2) 72(15.5,-1.5) 73(15.5,-1) 74(15.5,-0.5) 75(15.5,0)
  rect 0.3x1.2 smd: 26(1.75,-13.75) 27(2.25,-13.75) 28(2.75,-13.75) 29(3.25,-13.75) 30(3.75,-13.75) 31(4.25,-13.75) 32(4.75,-13.75) 33(5.25,-13.75) 34(5.75,-13.75) 35(6.25,-13.75) 36(6.75,-13.75) 37(7.25,-13.75) 38(7.75,-13.75) 39(8.25,-13.75) 40(8.75,-13.75) 41(9.25,-13.75) 42(9.75,-13.75) 43(10.25,-13.75) 44(10.75,-13.75) 45(11.25,-13.75) 46(11.75,-13.75) 47(12.25,-13.75) 48(12.75,-13.75) 49(13.25,-13.75) 50(13.75,-13.75) 76(13.75,1.75) 77(13.25,1.75) 78(12.75,1.75) 79(12.25,1.75) 80(11.75,1.75) 81(11.25,1.75) 82(10.75,1.75) 83(10.25,1.75) 84(9.75,1.75) 85(9.25,1.75) 86(8.75,1.75) 87(8.25,1.75) 88(7.75,1.75) 89(7.25,1.75) 90(6.75,1.75) 91(6.25,1.75) 92(5.75,1.75) 93(5.25,1.75) 94(4.75,1.75) 95(4.25,1.75) 96(3.75,1.75) 97(3.25,1.75) 98(2.75,1.75) 99(2.25,1.75) 100(1.75,1.75)
  silkscreen extent 1.13,-12.61 14.36,0.62
RES_2W [mm]
  round 3 hole 1.1: 1(0,0) 2(19.685,0)
  silkscreen extent 2.54,-2.54 17.14,2.54
SIM900_R [mm] "SIM900 or SIM900R"
  oval 1.6x0.6 smd: 1(0,0)
  rect 1.6x0.6 smd: 2(0,-1) 3(0,-2) 4(0,-3) 5(0,-4) 6(0,-5) 7(0,-6) 8(0,-7) 9(0,-8) 10(0,-9) 11(0,-10) 12(0,-11) 13(0,-12) 14(0,-13) 15(0,-14) 16(0,-15) 17(0,-16) 35(24,-16) 36(24,-15) 37(24,-14) 38(24,-13) 39(24,-12) 40(24,-11) 41(24,-10) 42(24,-9) 43(24,-8) 44(24,-7) 45(24,-6) 46(24,-5) 47(24,-4) 48(24,-3) 49(24,-2) 50(24,-1) 51(24,0)
  rect 0.6x1.6 smd: 18(4,-20) 19(5,-20) 20(6,-20) 21(7,-20) 22(8,-20) 23(9,-20) 24(10,-20) 25(11,-20) 26(12,-20) 27(13,-20) 28(14,-20) 29(15,-20) 30(16,-20) 31(17,-20) 32(18,-20) 33(19,-20) 34(20,-20) 52(20,4) 53(19,4) 54(18,4) 55(17,4) 56(16,4) 57(15,4) 58(14,4) 59(13,4) 60(12,4) 61(11,4) 62(10,4) 63(9,4) 64(8,4) 65(7,4) 66(6,4) 67(5,4) 68(4,4)
  silkscreen extent 1.33,-18.67 22.67,2.67
SIM_SD_HOLDER1 [mm]
  rect 1.5x2 smd: 0(-5.1,-2.38) 0(-5.1,-14.141)
  rect 1.8x1.8 hole 0.9: 0(-4.315,-16.23) 0(13.1,-16.23)
  rect 2x1.5 smd: 0(-3.7,-0.2) 0(11.7,-0.2)
  rect 0.5x1 smd: SD_CLK(6.2,0) SD_CMD(4,0) SD_DAT0(8.4,0) SD_DAT1(9.5,0) SD_DAT2(1.8,0) SD_DAT3(2.9,0) SD_GND(7.3,0) SD_PRES2(1,0) SD_VDD(5.1,0)
  rect 0.6x1 smd: SD_PRES1(0.2,0)
  rect 1.2x0.8 smd: SIM_CLK(13.6,-9.17) SIM_DATA(13.6,-7.9) SIM_GND(13.6,-12.98) SIM_RES(13.6,-11.71) SIM_VDD(13.6,-14.25) SIM_VPP(13.6,-10.44)
  silkscreen extent -3.17,-16.51 12.07,-1.9
SMA_FEMALE [mm]
  round 2.2 hole 1.3: 1(2.54,-2.54)
  round 3 hole 1.6: 2(0,-5.08) 2(0,0) 2(5.08,-5.08) 2(5.08,0)
  silkscreen extent -1.91,-6.98 6.98,1.91
SOD80 [mm]
  rect 1.37x1.62 smd: 1(0,0) 2(3.71,0)
  silkscreen extent -1.07,-1.18 4.78,1.18
SOP8 [mm]
  rect 1.5x0.7 smd: 1(0,0)
  oval 1.5x0.7 smd: 2(0,-1.27) 3(0,-2.54) 4(0,-3.81) 5(5.5,-3.81) 6(5.5,-2.54) 7(5.5,-1.27) 8(5.5,0)
  silkscreen extent 1.53,-4.44 3.97,0.64
SOP14 [mm]
  rect 1.5x0.7 smd: 1(0,0)
  oval 1.5x0.7 smd: 2(0,-1.27) 3(0,-2.54) 4(0,-3.81) 5(0,-5.08) 6(0,-6.35) 7(0,-7.62) 8(5.5,-7.62) 9(5.5,-6.35) 10(5.5,-5.08) 11(5.5,-3.81) 12(5.5,-2.54) 13(5.5,-1.27) 14(5.5,0)
  silkscreen extent 1.53,-8.25 3.97,0.64
SOP16 [mm]
  rect 1.5x0.7 smd: 1(0,0)
  oval 1.5x0.7 smd: 2(0,-1.27) 3(0,-2.54) 4(0,-3.81) 5(0,-5.08) 6(0,-6.35) 7(0,-7.62) 8(0,-8.89) 9(5.5,-8.89) 10(5.5,-7.62) 11(5.5,-6.35) 12(5.5,-5.08) 13(5.5,-3.81) 14(5.5,-2.54) 15(5.5,-1.27) 16(5.5,0)
  silkscreen extent 1.58,-9.53 3.92,0.64
SOT-23 [mm]
  rect 0.8x0.9 smd: 1(-0.95,0) 2(0.95,0) 3(0,2.3)
  silkscreen extent -1.91,0 1.91,1.91
SUP_SOCK_D5.5D1.8 [mm] "Socket for supply"
  rrect50% 5x3.6 hole 3: +(0,0) -(6.5,0) PRES(3.175,4.445)
  silkscreen extent 0,-4.44 13.97,4.45
"TERMINALS_7.7x15.5(step 5mm)" [mm]
  round 3 hole 1: 1(0,0) 2(5.08,0) 3(10.16,0)
  silkscreen extent -2.54,-3.81 12.7,3.81
TO-252(DPAK) [mm]
  rrect50% 1.2x2.2 smd: 1(0,0) 2(4.56,0)
  rrect10% 6x5 smd: 3(2.28,8.2)
  silkscreen extent -1.14,2.54 5.71,11.12
TSOP28 [mm]
  rect 1x0.3 smd: 1(0,0)
  oval 1x0.3 smd: 2(0,-0.55) 3(0,-1.1) 4(0,-1.65) 5(0,-2.2) 6(0,-2.75) 7(0,-3.3) 8(0,-3.85) 9(0,-4.4) 10(0,-4.95) 11(0,-5.5) 12(0,-6.05) 13(0,-6.6) 14(0,-7.15) 15(12.9,-7.15) 16(12.9,-6.6) 17(12.9,-6.05) 18(12.9,-5.5) 19(12.9,-4.95) 20(12.9,-4.4) 21(12.9,-3.85) 22(12.9,-3.3) 23(12.9,-2.75) 24(12.9,-2.2) 25(12.9,-1.65) 26(12.9,-1.1) 27(12.9,-0.55) 28(12.9,0)
  silkscreen extent 1.33,-7.42 11.59,0.27
TSSOP5 [mm]
  rect 0.6x1 smd: 1(1.9,2.4) 2(0.95,2.4) 3(0,2.4)
  rect 0.7x1 smd: 4(0,0) 5(1.9,0)
  silkscreen extent -0.71,-0.82 2.62,3.31

## Part data
C1 C2 C3 C4 C5 C6 C7 C8 C9 C10 C11 C12 C16 C18 C19 C20 C21 C22 C23 C27 C28 C29 C30 C31 C32 C33 C35 C36 C37 C38 C39 C40 C41 C43 C44 C45: library part C
C13 C14 C15 C17 C24 C25 C34: library part C_POL
D1 D5: library part D
D6 D7: library part D_Shottky
D8: library part "Zener diode"
D9 D10: library part 2xD2
DA1: library part LINEAR_REGULATOR
DA4: library part ncp1450
DA5 DA7 DA11 DA16: library part 4xOP.AMP
DA6 DA8 DA12 DA15 DA18: library part 2xOP.AMP
DA10: library part Shunt_VREF
DA13: library part 74HCx4053
DD2: library part STM32F103Vx
DD3: library part AT45DB161/321
L1: library part Inductor
LCD1: library part "LCD 16x2 HD44780"
LS1: library part Speaker
M1 M3 M13 M15 M16 M18 M20 M21 M22 M23 M24 M25 M26 M27 M28 M29 M38 M39 M40 M41 M42 M43 M44 M45 M46 M47 M48 M49 M50 M51 M52 M53 M56 M57 M58: library part NMOS+DIODE
M2 M4 M10 M17 M19 M30 M31 M32 M33 M34 M35 M36 M37 M54 M55: library part PMOS+DIODE
Q1: library part XTAL
Q2 Q3 Q4 Q5 Q6 Q7 Q8 Q9 Q10 Q11 Q12 Q13 Q14: library part PNP
R1 R2 R3 R4 R6 R8 R9 R10 R11 R12 R13 R14 R15 R16 R17 R18 R19 R20 R21 R22 R23 R24 R25 R28 R29 R30 R31 R32 R33 R34 R35 R36 R37 R38 R39 R40 R41 R42 R43 R44 R45 R46 R47 R48 R49 R50 R51 R52 R53 R54 R55 R56 R57 R58 R59 R60 R62 R64 R65 R66 R67 R68 R69 R70 R72 R73 R76 R77 R79 R84 R85 R86 R87 R88 R90 R91 R92 R93 R94 R95 R96 R97 R98 R99 R100 R101 R102 R103 R105 R106 R107 R108 R109 R110 R111 R112 R113 R114 R115 R116 R117 R120 R126 R127 R136 R137 R138 R139 R140 R142 R144 R145 R147 R148 R149 R150 R151 R152 R153 R154 R155 R156 R157 R158 R159 R160 R161 R162 R163 R164 R165 R166 R167 R168 R169 R170 R171 R172 R173 R174 R175 R176 R177 R178 R179 R180 R181 R182 R183 R184 R185 R186 R187 R188 R189 R190 R192 R193 R198 R200 R202 R204 R206 R210 R211 R212 R213 R214 R215: library part R
R7 R78 R89 R104: library part Radj
X1: library part MINI_USB_FEMALE
X2 X5 X7 X11 X19: library part CONT_2
X4 X8 X9 X10 X12 X13 X14 X17 X21 X22 X23 X26 X27 X28 X29 X32 X33: library part CONT_3
X6 X20: library part CONT_4
X24 X25: library part CONT_6

## Free pads (board coordinates)
  round 5 hole 3.2: 0(184.785,135.255) 0(184.785,208.915) 0(252.73,135.255) 0(252.73,208.915) 0(308.61,135.255) 0(308.61,208.915) 0(376.555,208.915)
  round 5 hole 3.2 unplated: 0(358.14,158.75)

## Via types
v1: diameter 0.7, hole 0.4, Top Layer to Bottom Layer, 390 vias
v2: diameter 1.3, hole 0.7, Top Layer to Bottom Layer, 15 vias
v3: diameter 1, hole 0.5, Top Layer to Bottom Layer, 6 vias
v4: diameter 1.2, hole 0.6, Top Layer to Bottom Layer, 6 vias
v5: diameter 1.5, hole 1, Top Layer to Bottom Layer, 3 vias
v6: diameter 1.4, hole 0.8, Top Layer to Bottom Layer, 2 vias

## Nets (pads, with @x,y where several pads share a name; then routed paths per layer and width w, separated by ;. In a path a pad name is that pad's centre, name@x,y a point inside that pad or via, vN(x,y) a via of type N, cw(c..) or ccw(c..) an arc to the next point about the centre after c; other vN are vias at no path point)
1.5V: C18.2 DA15.5 DA16.10 DA16.12 R198.2 R202.1 | length 29.2
  Bottom Layer w0.5: DA16.10@318.35,232.41 316.23,232.41 ; DA16.12@318.35,234.95 316.865,234.95 316.23,234.315 316.23,232.41 ; DA15.5@326.605,221.615 324.485,221.615 323.85,222.25 R198.2@323.85,223.52 R202.1@321.31,223.52 C18.2@318.77,223.52 315.595,223.52 314.325,224.79 314.325,230.505 316.23,232.41
3.3V_B1: C14.1 C16.2 C23.2 C27.2 C29.2 C30.2 D9.3 D10.3 DA1.out DA5.4 DA7.4 DA8.8 DA11.4 DA12.8 DD4.6 DD4.16 R50.1 R114.2 X24.3 X24.4 | length 339.6
  Top Layer w0.5: v1(183.515,174.625) 184.785,174.625 185.375,175.215 C16.2@185.375,180.975 185.375,182.2 186.055,182.88 195.58,182.88 196.215,183.515 196.215,187.325 198.12,189.23 206.375,189.23 208.28,189.23 208.915,188.595 208.915,182.245 207.645,180.975 v1(206.375,180.975) ; C23.2@190.715,204.845 DA8.8@190.715,207.01 ; v1(238.125,169.545) 238.125,172.72 v1(239.395,172.72) ; D10.3@244.235,178.435 249.135,178.435 ; v1(249.135,179.705) 249.135,178.435 ; 255.905,200.66 255.905,190.5 257.81,188.595 259.08,188.595 259.715,187.96 259.715,177.8 257.81,175.895 252.73,175.895 250.19,178.435 249.135,178.435
  Top Layer w0.7: 206.375,189.23 206.375,193.04 207.645,194.31 216.535,194.31 226.06,203.835 ; DA11.4@210.185,211.455 212.09,211.455 212.09,205.105 213.36,203.835 244.475,203.835 ; v1(250.19,172.72) 250.825,172.72 ; v1(251.46,172.72) 250.825,172.72 ; 257.81,200.66 257.81,191.135 258.445,190.5 260.985,190.5 261.62,189.865 261.62,177.8 258.445,174.625 252.095,174.625 251.46,174.625 250.825,173.99 250.825,172.72
  Top Layer w1.5: DA1.out@220.345,225.22 DA1.out@219.13,226.435 219.13,222.83 219.71,222.25 224.79,222.25 224.79,212.725 227.33,210.185 244.475,210.185 C14.1@244.475,209.885 244.475,200.66 255.905,200.66 257.81,200.66 X24.3@260.35,200.66 X24.4@260.35,198.12
  Bottom Layer w0.5: R114.2@181.02,174.625 v1(183.515,174.625) ; v1(191.126,204.92) 191.126,204.035 193.231,201.93 201.295,201.93 202.565,203.2 202.565,208.915 205.105,211.455 C27.2@212.045,211.455 ; v1(206.375,180.975) D9.3@207.885,180.975 ; v1(238.125,169.545) 238.805,168.865 C29.2@238.805,167.005 241.739,164.071 v1(244.475,164.071) ; v1(239.395,172.72) v1(250.19,172.72) v1(251.46,172.72) ; v1(249.135,179.705) 250.87,179.705 C30.2@252.095,180.93
  Bottom Layer w1: 227.33,226.06 R50.1@230.505,226.06
  other v1: 210.554,211.462 220.588,224.323 217.831,224.37 219.113,226.562 220.552,228.57 217.805,228.6
3.3V_B2: C1.2 C4.2 C8.1 C9.1 C10.2 C11.2 C12.2 C20.2 C40.2 C41.2 DA13.16 DA15.8 DA16.4 DD2.6 DD2.11 DD2.22 DD2.28 DD2.50 DD2.75 DD2.100 DD3.2 DD3.3 DD3.6 LCD1.VDD MIC1.+ R7.1 R16.1 R17.1 R18.1 R21.1 R22.1 R28.2 R29.2 R30.2 R31.2 R33.2 R34.2 R35.2 R36.2 R37.2 R38.2 R39.2 R40.2 R41.2 R42.1 R43.2 R198.1 RF1.2 X11.1 X16.SD_VDD X25.3 X25.4 | length 568.8
  Top Layer w0.3: v1(295.275,179.705) 304.165,179.705 306.07,177.8 R21.1@306.07,174.625 R22.1@306.07,172.085 ; v1(296.545,167.64) 299.72,164.465 RF1.2@299.72,163.195 ; v1(314.065,181.903) DD2.75@314.065,183.515 316.865,183.515 ; DD2.50@315.815,197.265 315.815,193.26 317.305,191.77 ; 326.855,204.3 DD3.3@328.295,204.3 329.395,204.3 329.61,204.515 329.61,205.695 ; 326.9,203.75 DD3.2@328.295,203.75 ; DD2.100@327.815,182.245 327.815,186.015 DD2.6@329.565,186.015 330.795,186.015 v1(331.47,186.69) ; DD2.22@329.565,194.015 326.815,194.015 ; v1(331.47,187.96) 330.915,188.515 DD2.11@329.565,188.515 326.945,188.515 326.39,187.96 325.12,189.23 325.12,192.32 326.815,194.015 ; C10.2@335.325,203.2 335.325,205.06 334.69,205.695 v1(332.74,205.695) 329.61,205.695 ; 326.815,194.015 DD2.28@326.815,197.265 326.815,205.53 327.235,205.95 DD3.6@328.295,205.95 329.355,205.95 329.61,205.695
  Top Layer w0.5: 316.865,183.515 320.675,187.325 ; 317.305,191.77 v1(320.675,191.77) 320.675,187.325 ; v1(323.85,233.68) 323.85,231.14 v1(327.66,227.33) 328.93,227.33 328.93,229.19 C40.2@328.885,229.235 C41.2@328.885,231.775 ; 326.39,187.325 320.675,187.325 ; 326.39,187.96 326.39,186.055 327.775,186.055 ; v1(331.47,186.69) v1(331.47,187.325) v1(331.47,187.96) ; v1(349.25,184.15) v1(349.25,184.785)
  Top Layer w0.7: v1(349.25,184.15) v1(349.25,190.5) ; v1(360.68,205.105) 363.855,208.28 v6(371.475,208.28) 371.475,215.265 373.38,217.17 379.095,217.17 384.81,222.885 384.81,224.79 ; v6(371.475,204.47) 371.475,200.66 374.015,198.12 X25.4@384.175,198.12 ; C1.2@386.035,224.79 384.81,224.79 ; R7.1@386.08,227.965 384.81,227.965 ; LCD1.VDD@386.715,236.855 386.715,234.95 384.81,233.045 384.81,227.965 ; 384.81,224.79 384.81,227.965
  Bottom Layer w0.3: R35.2@294.595,217.17 R37.2@294.595,213.995 R38.2@294.595,210.82 R39.2@294.595,207.645 294.595,205.695 294.005,205.105 294.005,179.705 ; v1(295.275,179.705) 294.005,179.705 ; v1(296.545,167.64) 294.005,170.18 294.005,179.705 ; R43.2@310.515,158.115 310.515,163.195 ; v1(325.12,191.77) C9.1@325.12,194.31
  Bottom Layer w0.5: MIC1.+@312.42,238.125 312.42,238.76 313.69,240.03 320.675,240.03 321.945,238.76 321.945,233.68 v1(323.85,233.68) ; 314.325,163.195 314.325,150.495 331.49,133.33 v1(356.235,133.33) v1@361.295,133.33 ; C20.2@319.405,191.725 C4.2@321.945,191.725 ; R198.1@323.895,225.425 DA15.8@326.605,225.425 326.605,226.275 v1(327.66,227.33) 332.74,227.33 334.01,226.06 334.01,224.79 334.645,224.155 338.455,224.155 340.995,226.695 v1(342.265,226.695) ; 331.47,163.195 v1(331.47,164.465) ; v1(331.47,187.96) 331.47,189.865 332.105,190.5 v1(349.25,190.5) ; 336.55,163.195 v1(336.55,164.465) ; v1(349.885,172.72) 350.52,172.72 ; R31.2@361.315,138.43 v1(361.315,133.35) v1@361.295,133.33 ; v1(361.36,129.54) 361.295,129.605 v1@361.295,133.33
  Bottom Layer w0.7: RF1.2@299.72,163.195 310.515,163.195 331.47,163.195 336.55,163.195 345.44,163.195 350.52,168.275 350.52,172.72 350.52,182.88 v1(349.25,184.15) v1(349.25,184.785) v1(349.25,185.42) ; 338.455,224.155 338.455,219.075 340.36,217.17 365.76,217.17 367.03,215.9 367.03,200.66 X25.3@384.175,200.66 X25.4@384.175,198.12 ; v1(349.25,189.23) v1(349.25,189.865) v1(349.25,190.5) 349.25,191.77 354.965,197.485 359.41,197.485 360.68,198.755 v1(360.68,205.105) ; v6(371.475,204.47) v6(371.475,208.28)
  other v1: 361.36,135.89 360.68,203.835 360.68,204.47
3V_B1: DA11.13 DA11.14 DA18.6 R104.1 R136.1 R137.1 R138.1 X24.5 | length 97.2
  Top Layer w0.5: R104.1@200.66,209.55 200.66,215.265 v1(202.565,217.17) 203.835,218.44 203.835,224.79 202.565,226.06 DA18.6@201.08,226.06 ; R138.1@205.105,214.63 R137.1@207.645,214.63 v1(207.645,217.17) ; DA11.14@215.685,215.265 DA11.13@215.685,213.995 220.98,213.995 226.695,208.28 v1(241.935,208.28) ; DA11.14@215.9,215.48 v1(215.9,217.17)
  Bottom Layer w0.5: v1(202.565,217.17) v1(207.645,217.17) v1(215.9,217.17) ; v1(241.935,208.28) 247.65,208.28 251.46,204.47 255.905,204.47 257.81,202.565 257.81,196.215 258.445,195.58 X24.5@260.35,195.58
3V_B2: X25.5
4V_B1: C17.1 DA4.1 L1.2 R139.1 X21.3 X26.1 X27.1 | length 45.6
  Top Layer w0.5: v1(252.59,222.258) 254.943,222.258 C17.1@255.27,222.585
  Top Layer w1: L1.2@243.84,219.71 248.285,219.71 248.92,219.075 254.635,219.075 255.27,219.71 C17.1@255.27,222.585 259.415,222.585 X21.3@261.62,224.79
  Bottom Layer w0.5: R139.1@243.205,215.265 243.84,215.9 L1.2@243.84,219.71 ; DA4.1@251.455,222.39 251.587,222.258 v1(252.59,222.258)
  Bottom Layer w2: X21.3@261.62,224.79 257.81,220.98 257.81,217.17 259.08,215.9 X27.1@260.35,215.9 X26.1@262.89,215.9
4V_B2: C34.1 C35.2 DA14.12 LCD1.LED+ M19.2 R115.1 X28.1 X29.1 | length 124.2
  Top Layer w0.7: v3(338.455,232.11) 336.85,232.11 335.915,233.045 335.915,238.76 337.185,240.03 363.22,240.03 363.855,239.395 LCD1.LED+@363.855,236.855
  Top Layer w1: 386.08,188.595 384.81,187.325 384.81,185.42 385.76,184.47 v1(387.35,184.47)
  Top Layer w2: X29.1@384.175,215.9 X28.1@386.715,215.9 388.62,215.9 389.89,214.63 389.89,192.405 386.08,188.595
  Bottom Layer w0.7: DA14.12@335.495,233.68 C35.2@338.41,233.68 ; v3(338.455,232.11) C35.2@338.455,233.635 C35.2@338.455,233.68
  Bottom Layer w1: LCD1.LED+@363.855,236.855 363.855,234.315 368.935,229.235 381.635,229.235 384.175,226.695 X29.1@384.175,215.9 X28.1@386.715,215.9
  other v3: 338.471,233.155
12V_B1: C15.1 C21.2 D6.2 D7.2 DA6.8 M54.2 M55.2 R44.2 R51.2 R56.1 R57.1 R59.2 R62.1 R64.2 R87.1 R147.1 R148.1 R149.1 R150.1 R151.1 R152.1 R153.1 R154.1 R155.1 R156.1 R157.1 R158.1 R159.1 R160.1 R161.1 R162.1 R166.1 R167.1 X21.1 | length 426.1
  Top Layer w0.5: v2(231.14,170.815) 232.41,168.91 v1(232.41,155.575) v1(232.41,142.24) v1(232.41,128.27)
  Top Layer w0.7: R151.1@209.55,129.855 v1(211.137,129.855) R152.1@212.725,129.855 ; R149.1@209.55,143.825 R150.1@212.725,143.825 ; R147.1@209.55,157.16 v1(211.137,157.16) R148.1@212.725,157.16 ; R157.1@225.425,129.855 v1(227.012,129.855) R158.1@228.6,129.855 ; R155.1@225.425,143.825 R156.1@228.6,143.825 ; R153.1@225.425,157.16 v1(227.012,157.16) R154.1@228.6,157.16 ; R161.1@242.57,129.855 v1(244.157,129.855) ; R159.1@242.57,143.825 R160.1@245.745,143.825 ; R162.1@245.745,129.855 v1(244.157,129.855) ; v1(263.525,132.715) 254.635,123.825 247.015,123.825 244.157,126.682 v1(244.157,129.855)
  Top Layer w2: D7.2@237.575,234.664 D6.2@241.85,234.664 253.016,234.664 257.81,229.87 X21.1@261.62,229.87
  Bottom Layer w0.5: R56.1@170.815,142.875 R57.1@170.815,147.32 R62.1@170.815,151.765 170.815,154.305 173.355,156.845 R44.2@177.8,156.845 ; v1(211.137,129.855) 211.137,128.27 227.012,128.27 ; v1(211.137,157.16) 211.137,155.575 227.012,155.575 ; v1(211.149,143.847) 211.149,142.24 227.008,142.24 ; R87.1@214.63,175.895 215.9,175.895 216.535,176.53 v1(223.52,176.53) ; 226.695,176.53 C21.2@226.695,178.39 ; v1(227.008,143.793) 227.008,142.24 ; v1(227.012,129.855) 227.012,128.27 ; v1(227.012,157.16) 227.012,155.575 ; 231.775,172.085 R64.2@231.775,174.58 ; v1(232.41,155.575) 227.012,155.575 ; v1(244.157,129.855) 244.157,128.27 v1(232.41,128.27) 227.012,128.27 ; v1(244.158,143.795) 244.158,142.24 227.008,142.24
  Bottom Layer w0.7: v1(223.52,176.53) 224.155,176.53 226.695,176.53 226.695,175.26 v2(231.14,170.815) ; v1(260.698,148.585) 263.52,148.585 ; R166.1@261.62,139.7 263.525,139.7 ; R167.1@261.62,143.51 263.525,143.51 ; v1(263.525,132.715) 263.525,139.7 ; 263.525,148.59 263.525,143.51 ; 263.525,139.7 263.525,143.51
  Bottom Layer w2: R44.2@177.8,156.845 177.8,161.29 179.07,162.56 C15.1@187.96,162.56 197.485,162.56 ; R51.2@197.485,156.845 197.485,162.56 ; D7.2@237.575,234.664 236.22,233.309 236.22,218.44 232.41,214.63 232.41,210.185 237.49,205.105 237.49,177.165 v2(231.14,170.815) 229.235,168.91 203.835,168.91 197.485,162.56